# EAGLE board alicishcmtc (EAGLE 9.5.0)
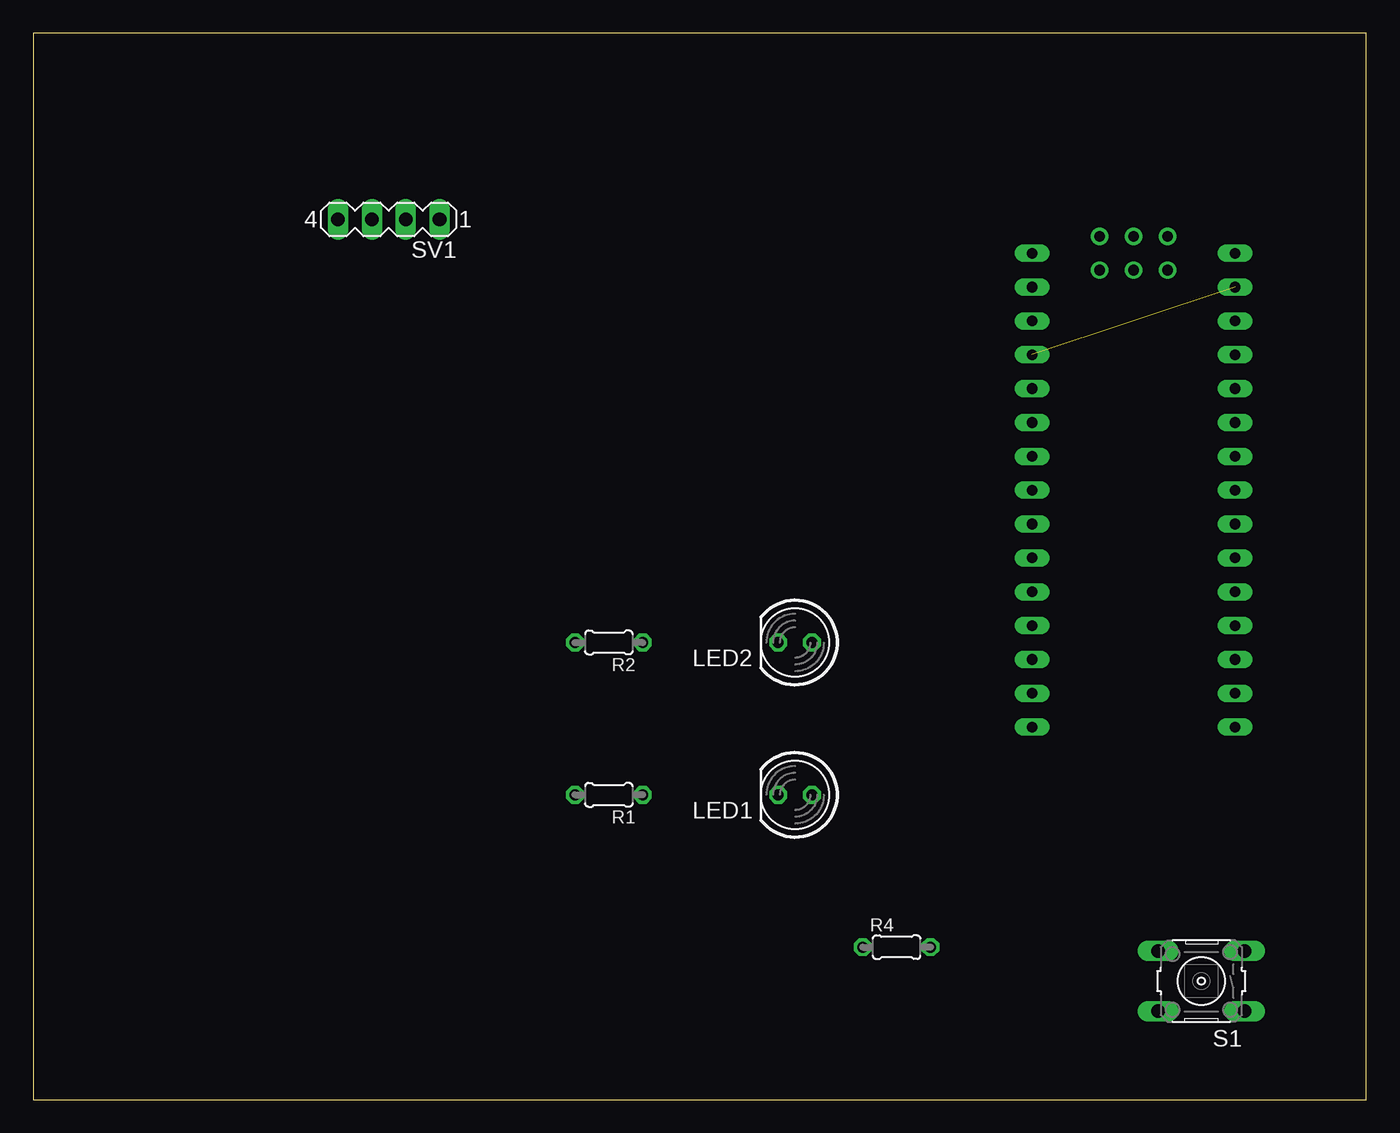
[diagram p0: board, top side]
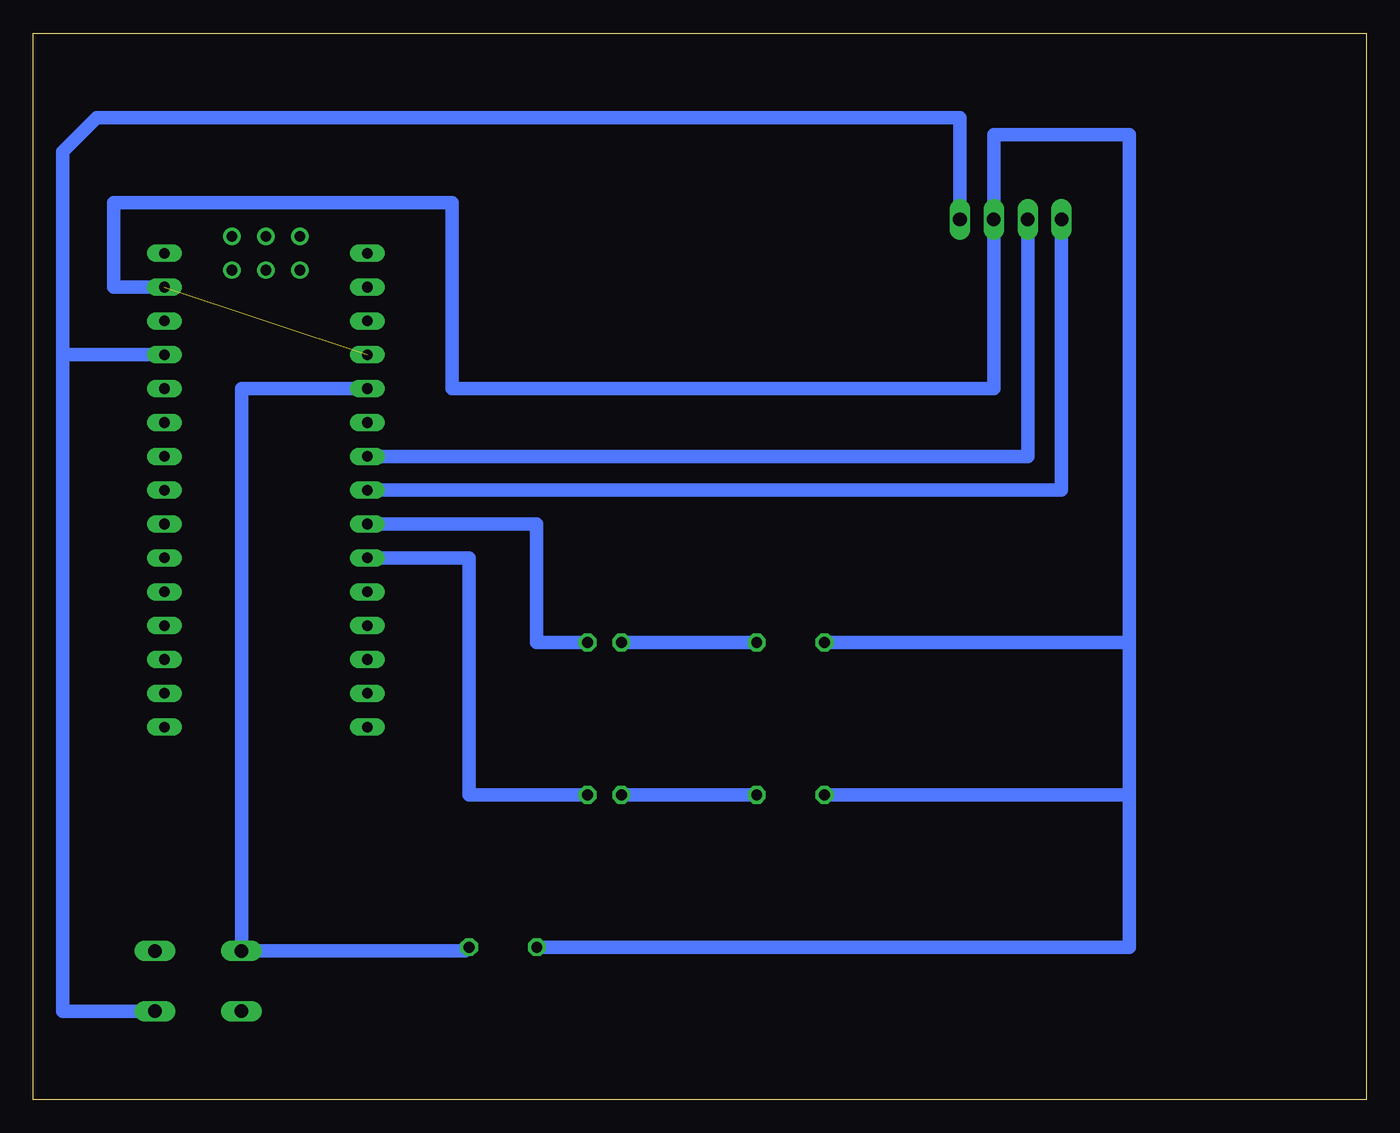
[diagram p1: board, bottom side, seen from below]

Size 100 x 80 mm. Coordinates in mm from the lower left corner, seen from the top.
Outline: 0,0 100,0 100,80 0,80 0,0
Copper layers (1*16): Top 0.035mm / dielectric 1.5mm / Bottom 0.035mm
Design rules "default": minimum track width 6mil, minimum drill 0.35mm, track to track 6mil, track to pad 6mil, pad to pad 6mil, via to via 6mil, smd to smd 6mil, copper to edge 40mil, drill to drill 6mil, minimum pad ring 10mil, minimum via ring 8mil, stop-mask expansion 4mil, vias tented up to drill 0mil, thermal gap 10mil

## Footprints (pad centres in the part's own frame; a part is rotated, then mirrored left to right if it is on the bottom)
LED5MM = drill 0.813 octagon: A -1.27,0; K 1.27,0
0204/5 = drill 0.813 octagon: 1 -2.54,0; 2 2.54,0
B3F-10XX = drill 1.016 long: 1 -3.251,2.261; 2 3.251,2.261; 3 -3.251,-2.261; 4 3.251,-2.261
MA04-1 = drill 1.016 long: 1 -3.81,0; 2 -1.27,0; 3 1.27,0; 4 3.81,0
NANO = drill 0.8 long: 3.3V -10.16,24.13; 5V -10.16,-1.27; A0 -10.16,19.05; A1 -10.16,16.51; A2 -10.16,13.97; A3 -10.16,11.43; A4 -10.16,8.89; A5 -10.16,6.35; A6 -10.16,3.81; A7 -10.16,1.27; AREF -10.16,21.59; D2 5.08,1.27; D3 5.08,3.81; D4 5.08,6.35; D5 5.08,8.89; D6 5.08,11.43; D7 5.08,13.97; D8 5.08,16.51; D9 5.08,19.05; D10 5.08,21.59; D11 5.08,24.13; D12 5.08,26.67; D13 -10.16,26.67; GND -10.16,-6.35; GND1 5.08,-1.27; RAW -10.16,-8.89; RST -10.16,-3.81; RST1 5.08,-3.81; RX1 5.08,-6.35; TX0 5.08,-8.89 | drill 0.8: ICSP1 -5.08,-10.16; ICSP2 -5.08,-7.62; ICSP3 -2.54,-10.16; ICSP4 -2.54,-7.62; ICSP5 0,-10.16; ICSP6 0,-7.62

## Placement (x,y rotation side)
LED1  [LED5MM]  57.15,22.86 180 top
LED2  [LED5MM]  57.15,34.29 180 top
R1  [0204/5]  43.18,22.86 180 top
R2  [0204/5]  43.18,34.29 180 top
R4  [0204/5]  64.77,11.43 0 top
S1  [B3F-10XX]  87.63,8.89 180 top
SV1  [MA04-1]  26.67,66.04 180 top
U$1  NANO  [NANO]  80.01,54.61 180 top

## Library data of the parts
LED1 LED2 = led
R1 R2 R4 = rcl; SPICEPREFIX: R
S1 = switch-omron; MPN: B3F-1000; OC_FARNELL: 176432; OC_NEWARK: 36M3542
SV1 = con-lstb; OC_FARNELL: unknown; OC_NEWARK: unknown
U$1 = Arduino-clone

## Nets
BLNK: LED1.A U$1.D7
GND2: R1.2 R2.2 R4.1 SV1.2 U$1.GND U$1.GND1
N$1: LED1.K R1.1
N$2: LED2.K R2.1
RX: SV1.4 U$1.D5
SNK: LED2.A U$1.D6
SNKBTN: R4.2 S1.4 U$1.D2
TX: SV1.3 U$1.D4
VCC: S1.1 SV1.1 U$1.5V

## Tracks (layer width: path | path; a pad name or v marks a point on that pad's centre or on a via)
BLNK
  Bottom 1.016: U$1.D7 67.31,40.64 67.31,22.86 LED1.A
GND2  (1 unrouted)
  Bottom 1.016: U$1.GND 93.98,60.96 93.98,67.31 68.58,67.31 68.58,53.34 27.94,53.34 SV1.2 27.94,72.39 17.78,72.39 17.78,34.29 | R4.1 17.78,11.43 17.78,22.86 | 17.78,22.86 17.78,34.29 | R2.2 17.78,34.29 | R1.2 17.78,22.86
N$1
  Bottom 1.016: LED1.K R1.1
N$2
  Bottom 1.016: LED2.K R2.1
RX
  Bottom 1.016: SV1.4 22.86,45.72 U$1.D5
SNK
  Bottom 1.016: U$1.D6 62.23,43.18 62.23,34.29 LED2.A
SNKBTN
  Bottom 1.016: U$1.D2 84.38,53.34 S1.4 67.59,11.15 R4.2
TX
  Bottom 1.016: SV1.3 25.4,48.26 U$1.D4
VCC
  Bottom 1.016: SV1.1 30.48,73.66 95.25,73.66 97.79,71.12 97.79,55.88 | 97.79,55.88 U$1.5V | S1.1 97.79,6.63 97.79,55.88